# EAGLE board c pubsub_lower_isolate 5V (EAGLE 9.4.2)
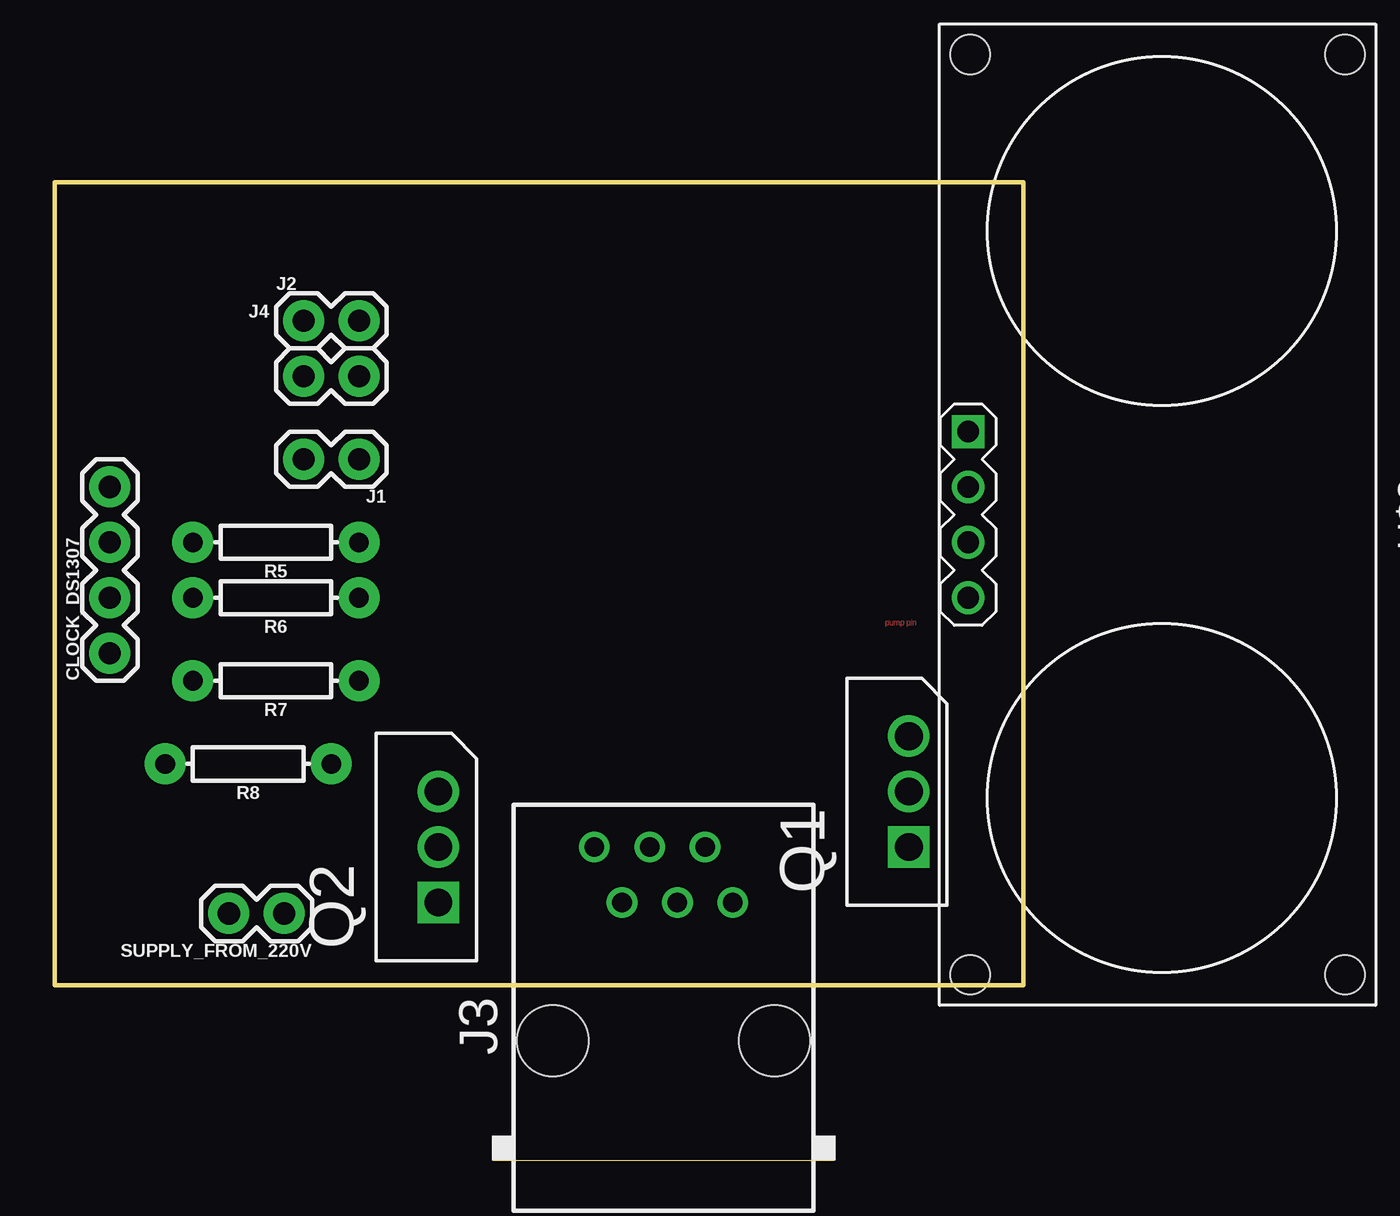
[diagram p0: board, top side]
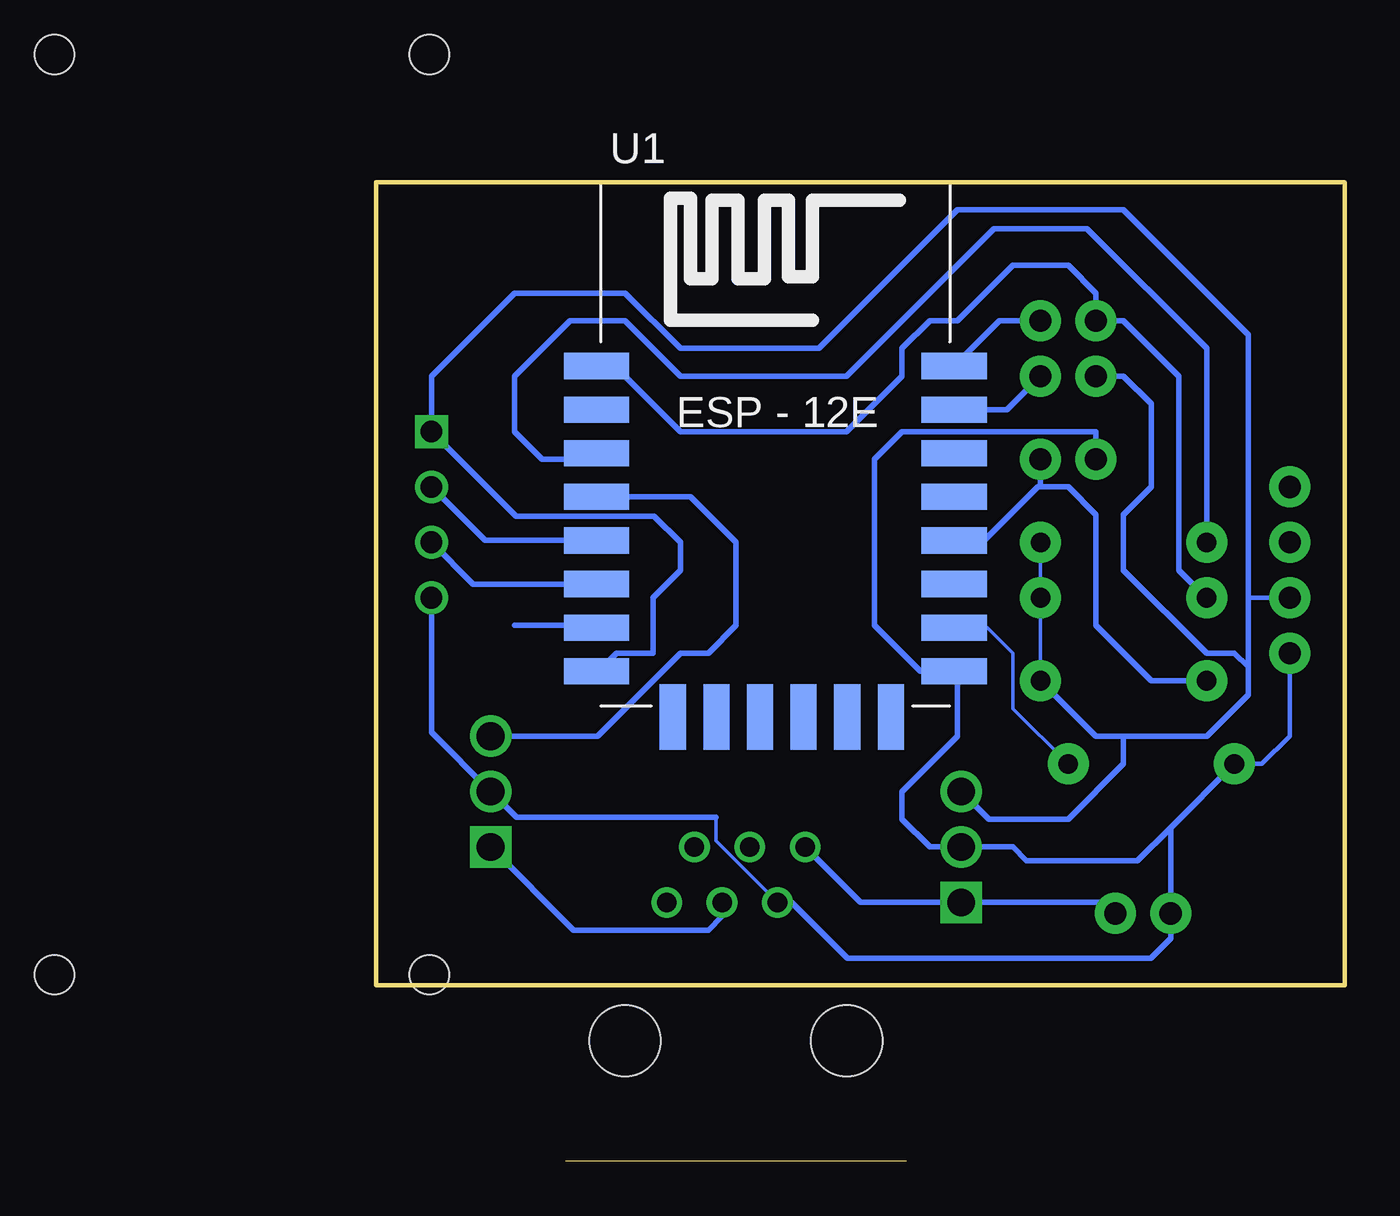
[diagram p1: board, bottom side, seen from below]

Size 44.45 x 36.83 mm. Coordinates in mm from the lower left corner, seen from the top.
Outline: 0,0 0,36.83 44.45,36.83 44.45,0 0,0
Copper layers (1*16): Top 0.035mm / dielectric 1.5mm / Bottom 0.035mm
Design rules "default": minimum track width 6mil, minimum drill 0.35mm, track to track 6mil, track to pad 6mil, pad to pad 6mil, via to via 6mil, smd to smd 6mil, copper to edge 40mil, drill to drill 6mil, minimum pad ring 10mil, minimum via ring 8mil, stop-mask expansion 4mil, vias tented up to drill 0mil, thermal gap 10mil

## Footprints (pad centres in the part's own frame; a part is rotated, then mirrored left to right if it is on the bottom)
1X04 = drill 1.016 pad 1.88: 1 0,0; 2 2.54,0; 3 5.08,0; 4 7.62,0
1X02 = drill 1.016 pad 1.88: 1 0,0; 2 2.54,0
RJ11-NO_SHIELD = drill 0.9 pad 1.4: 1 -3.175,8.89; 2 -1.905,6.35; 3 -0.635,8.89; 4 0.635,6.35; 5 1.905,8.89; 6 3.175,6.35 | hole 3.251: -5.08,0; 5.08,0
TO254P450X1020X1935-3P = drill 1.27 square: 1 -5.08,-1.092 | drill 1.27: 2 -2.54,-1.092; 3 0,-1.092
AXIAL-0.3 = drill 0.9 pad 1.88: P$1 -3.81,0; P$2 3.81,0
ESP12E-SMD = smd 3 x 1.2: ADC -8.3,3.8; CH_PD -8.3,1.8; GND 8.1,-8.2; GPIO0 8.1,-2.2; GPIO2 8.1,-4.2; GPIO4 8.1,-0.2; GPIO5 8.1,1.8; GPIO12 -8.3,-4.2; GPIO13 -8.3,-6.2; GPIO14 -8.3,-2.2; GPIO15 8.1,-6.2; GPIO16 -8.3,-0.2; RESET -8.3,5.8; RXD0 8.1,3.8; TXD0 8.1,5.8; VCC -8.3,-8.2 | smd 1.2 x 3: CS0 -4.8,-10.3; GPIO9 -0.8,-10.3; GPIO10 1.2,-10.3; MISO -2.8,-10.3; MOSI 3.2,-10.3; SCLK 5.2,-10.3
ULTRASONIC-HC-SR04 = drill 1 square: 1 -3.81,-8.89 | drill 1: 2 -1.27,-8.89; 3 1.27,-8.89; 4 3.81,-8.89 | hole 1.8: -21.1,8.4; -21.1,-8.8; 21.1,-8.8; 21.1,8.4

## Placement (x,y rotation side)
CLOCK_DS1307  [1X04]  2.54,15.24 90 top
J1  [1X02]  13.97,24.13 180 top
J2  [1X02]  11.43,30.48 0 top
J3  RJ11-6L-B  [RJ11-NO_SHIELD]  27.94,-2.54 0 top
J4  [1X02]  11.43,27.94 0 top
Q1  LF33CV  [TO254P450X1020X1935-3P]  38.1,11.43 90 top
Q2  LF33CV  [TO254P450X1020X1935-3P]  16.51,8.89 90 top
R5  10k  [AXIAL-0.3]  10.16,20.32 180 top
R6  10k  [AXIAL-0.3]  10.16,17.78 180 top
R7  10k  [AXIAL-0.3]  10.16,13.97 180 top
R8  10k  [AXIAL-0.3]  8.89,10.16 180 top
SUPPLY_FROM_220V  [1X02]  10.54,3.3 180 top
U1  [ESP12E-SMD]  26.04,22.61 0 bottom
U$2  ULTRASONIC-HC-SR04  [ULTRASONIC-HC-SR04]  50.8,21.59 270 top

## Library data of the parts
CLOCK_DS1307 = SparkFun-Connectors; PROD_ID: CONN-09696
J1 J2 J4 SUPPLY_FROM_220V = SparkFun-Connectors
J3 = con-tycoelectronics; MF: TYCO ELECTRONICS; MPN: RJ11-6L-B; OC_FARNELL: unknown; OC_NEWARK: 52K3613
Q1 Q2 = LF33CV; DESCRIPTION: Linear Voltage Regulator IC 1 Output 500mA TO-220AB; DIGI-KEY_PART_NUMBER: 497-7313-5-ND; DIGI-KEY_PURCHASE_URL: https://www.digikey.pk/product-detail/en/stmicroelectronics/LF33CV/497-7313-5-ND/1038546?utm_source=snapeda&utm_medium=aggregator&utm_campaign=symbol; MF: STMicroelectronics; MP: LF33CV; PACKAGE: TO-220 STMicroelectronics
R5-R8 = SparkFun-Resistors; PROD_ID: RES-12183
U1 = esp8266modules
U$2 = diy-modules

## Nets
5V: J3.1 Q2.1 SUPPLY_FROM_220V.1
GND: CLOCK_DS1307.1 J1.2 J3.2 Q1.2 Q2.2 R8.P$2 SUPPLY_FROM_220V.2 U1.GND U$2.4
N$1: R8.P$1 U1.GPIO15
N$2: J2.2 U1.TXD0
N$3: J2.1 R6.P$2 U1.RESET
N$4: R5.P$2 U1.CH_PD
N$6: J4.2 U1.RXD0
N$7: CLOCK_DS1307.2 J4.1 Q2.3 R5.P$1 R6.P$1 R7.P$1 U1.VCC U$2.1
N$9: Q1.3 U1.GPIO16
N$11: J3.4 Q1.1
N$12: J1.1 R7.P$2 U1.GPIO0
N$13: U1.GPIO14 U$2.2
N$14: U1.GPIO12 U$2.3
PUMPPIN: U1.GPIO13
SCL: CLOCK_DS1307.4 U1.GPIO5
SDA: CLOCK_DS1307.3 U1.GPIO4

## Tracks (layer width: path | path; a pad name or v marks a point on that pad's centre or on a via)
5V
  Bottom 0.254: J3.1 22.23,3.81 Q2.1 11.05,3.81 SUPPLY_FROM_220V.1
GND
  Bottom 0.152: J3.2 28.86,6.64 28.86,7.71
  Bottom 0.203: CLOCK_DS1307.1 2.54,11.43 3.81,10.16 R8.P$2
  Bottom 0.254: U$2.4 41.91,11.61 Q1.2 38.01,7.71 28.86,7.71 | J3.2 25.4,3.81 22.84,1.25 8.91,1.25 8,2.16 SUPPLY_FROM_220V.2 8,7.24 | R8.P$2 8,7.24 | 8,7.24 9.53,5.71 14.61,5.71 15.24,6.35 Q2.2 19.05,6.35 20.32,7.62 20.32,8.89 17.78,11.43 17.78,14.25 U1.GND 19.49,14.41 21.59,16.51 21.59,24.13 20.32,25.4 11.43,25.4 J1.2
N$1
  Bottom 0.152: R8.P$1 15.24,12.7 15.24,15.24 16.41,16.41 U1.GPIO15
  Bottom 0.254: 17.78,16.41 U1.GPIO15
N$2
  Bottom 0.254: J2.2 15.86,30.48 U1.TXD0
N$3
  Bottom 0.254: U1.RESET 33.49,28.41 30.48,25.4 22.86,25.4 20.32,27.94 20.32,29.21 19.05,30.48 17.78,30.48 15.24,33.02 12.7,33.02 11.43,31.75 J2.1 10.16,30.48 7.62,27.94 7.62,19.05 R6.P$2
N$4
  Bottom 0.254: U1.CH_PD 34.61,24.13 36.83,24.13 38.1,25.4 38.1,27.94 35.56,30.48 33.02,30.48 30.48,27.94 22.86,27.94 16.1,34.7 11.84,34.7 6.35,29.21 R5.P$2
N$6
  Bottom 0.254: J4.2 15.5,26.41 U1.RXD0
N$7
  Bottom 0.152: 34.29,13.97 34.34,14.02 U1.VCC | R7.P$1 R6.P$1 R5.P$1
  Bottom 0.203: CLOCK_DS1307.2 4.45,17.78
  Bottom 0.254: U1.VCC 34.29,14.36 33.41,15.24 31.75,15.24 31.75,17.78 30.48,19.05 30.48,20.32 31.69,21.53 38.04,21.53 U$2.1 41.91,27.94 38.1,31.75 33.02,31.75 30.48,29.21 24.13,29.21 17.78,35.56 10.16,35.56 4.45,29.84 4.45,17.78 4.45,14.61 | Q2.3 16.33,7.62 12.7,7.62 10.16,10.16 10.16,11.43 | J4.1 10.16,27.94 8.89,26.67 8.89,22.86 10.16,21.59 10.16,19.05 6.35,15.24 5.08,15.24 4.45,14.61 | R7.P$1 11.43,11.43 10.16,11.43 | 4.45,14.61 4.45,13.34 6.35,11.43 10.16,11.43
N$9
  Bottom 0.254: U1.GPIO16 30.03,22.41 27.94,20.32 27.94,16.51 29.21,15.24 30.48,15.24 34.29,11.43 Q1.3
N$11
  Bottom 0.254: Q1.1 35.38,2.54 29.21,2.54 28.57,3.17 J3.4
N$12
  Bottom 0.152: 17.9,20.44 17.84,20.5
  Bottom 0.203: 18.54,20.41 U1.GPIO0
  Bottom 0.254: 13.97,22.86 J1.1 | 13.97,22.86 12.7,22.86 11.43,21.59 11.43,16.51 8.89,13.97 R7.P$2 | 13.97,22.86 14.09,22.86 16.54,20.41 U1.GPIO0 17.9,20.44
N$13
  Bottom 0.254: 35.47,20.41 U1.GPIO14 39.46,20.41 U$2.2
N$14
  Bottom 0.254: U$2.3 40,18.41 U1.GPIO12
PUMPPIN
  Bottom 0.254: U1.GPIO13 34.44,16.51 38.1,16.51

## Text on the board
Top: pump pin